# Altium PCB PCB1.PcbDoc
Units mm, origin at the board's own origin, x right, y up, seen from the top; angles counter-clockwise.
Board outline 124.25 x 58 mm, 2 copper layers (Top Layer, Bottom Layer); 80 components, 57 nets, 220 pads, 46 vias.
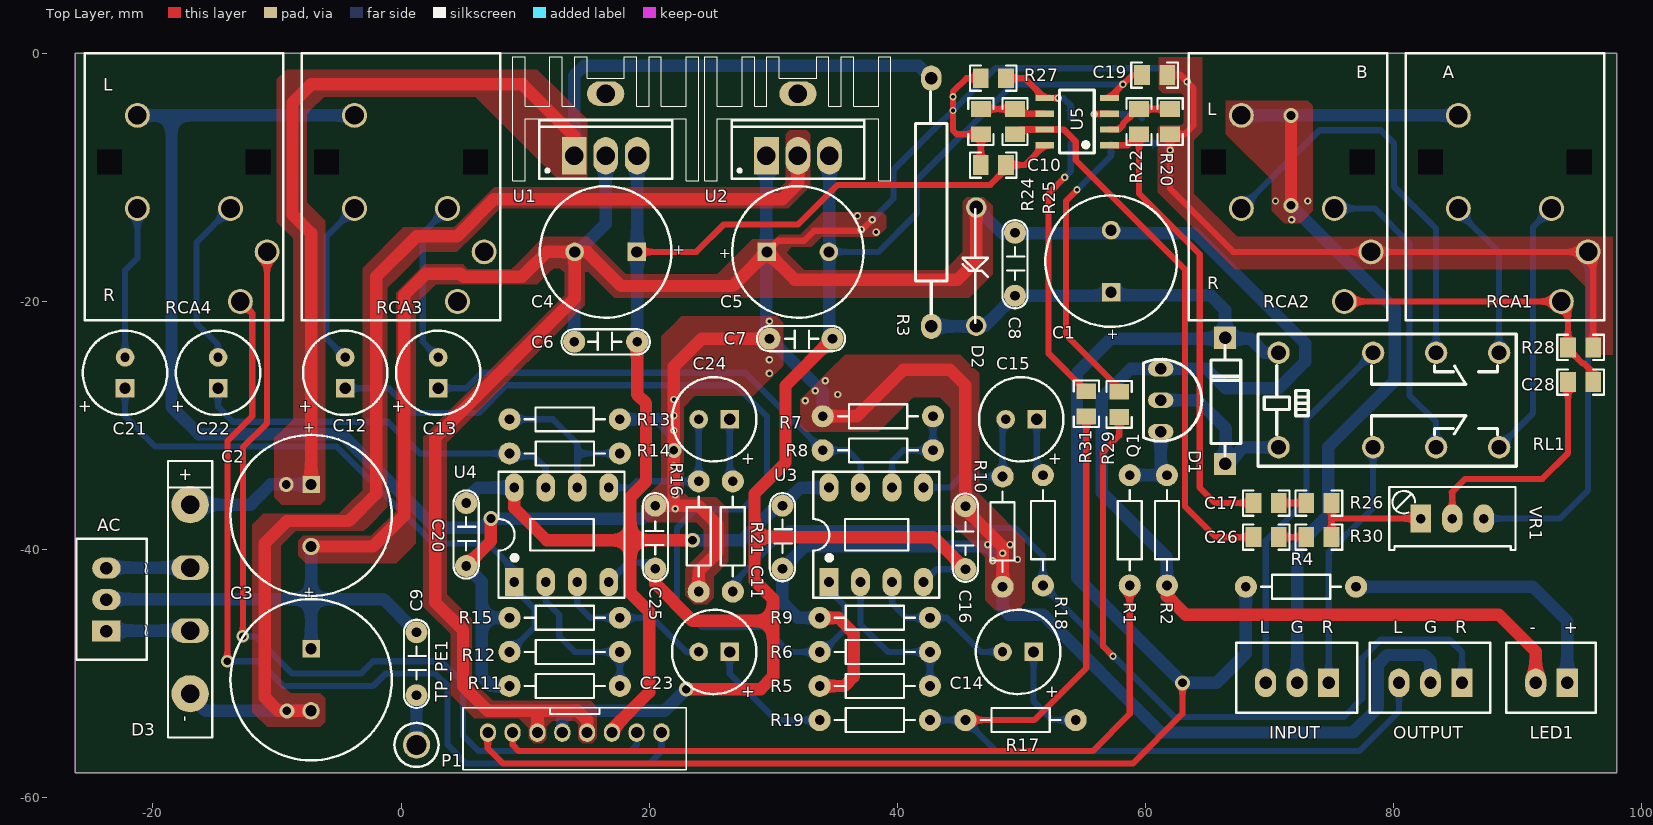
[diagram p0: Top Layer view]
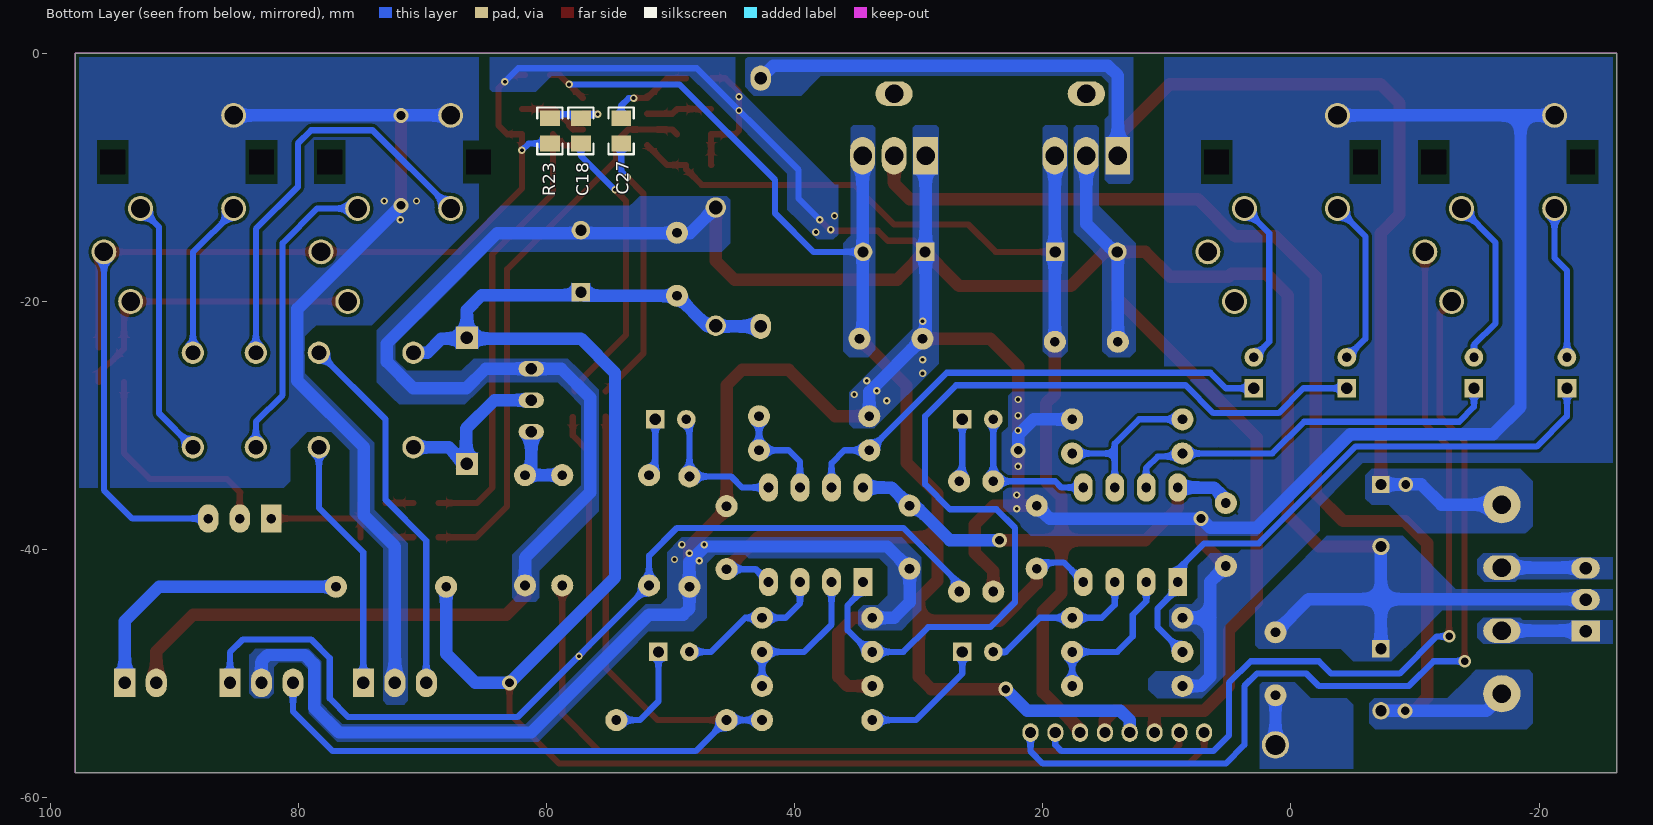
[diagram p1: Bottom Layer view, seen from below]
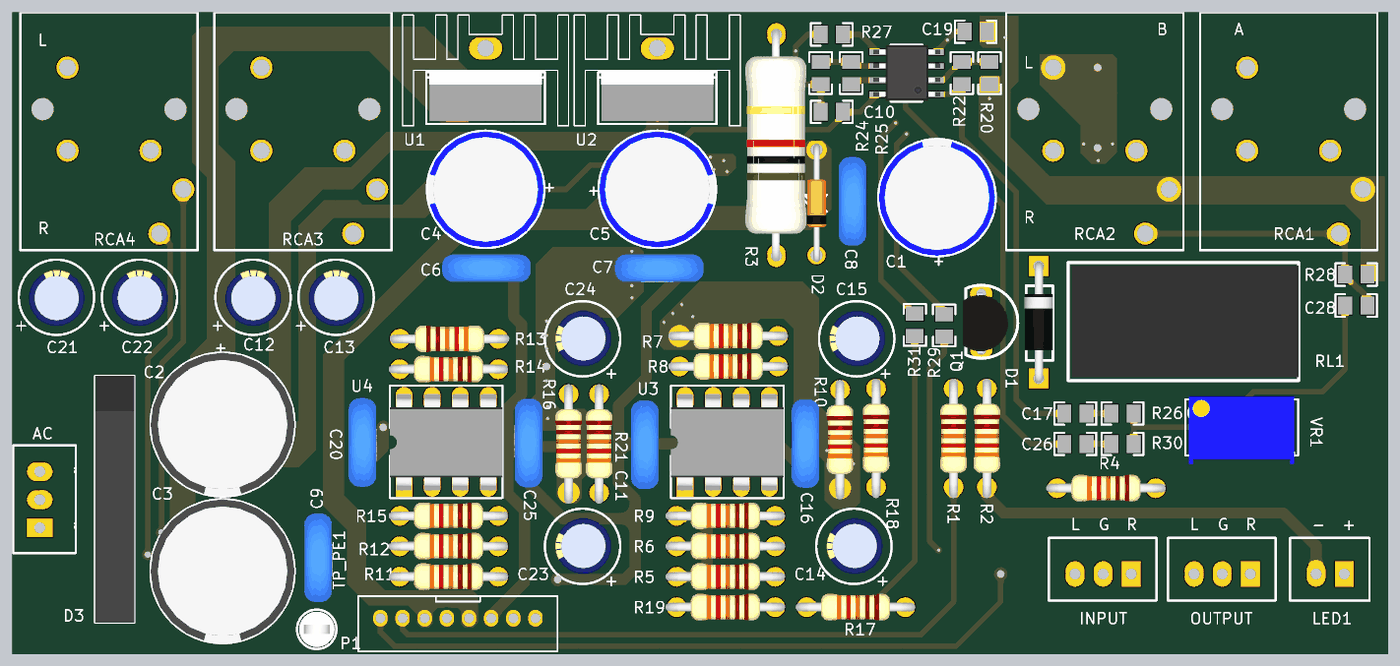
[diagram p2: 3D render of the assembled board from above, using the file's embedded part models]

## Layer stack, top to bottom
Top Solder: solder mask 0.0102, Solder Resist, Dk 3.5
Top Layer: signal copper 0.0356
Dielectric 1: dielectric 0.32, FR-4, Dk 4.8
Bottom Layer: signal copper 0.0356
Bottom Solder: solder mask 0.0102, Solder Resist, Dk 3.5

## Board outline
-26.25,-58 98,-58 98,0 -26.25,0

## Design rules (kind name [scope] priority, off if disabled: settings)
Clearance [All] p1: gap=0.254
MinimumSolderMaskSliver [All] p1: minsoldermaskwidth=0.1
PolygonConnect [All] p1: connectstyle=Direct reliefconductorwidth=0.254 reliefentries=4 polygonreliefangle="90 Angle" airgapwidth=0.254
RoutingVias [All] p1: holewidth=0.711 width=1.27 viastyle="Through Hole" minholewidth=0.3 minwidth=0.3 maxholewidth=5 maxwidth=5
SilkToSolderMaskClearance [IsPad] p1: minsilkscreentomaskgap=0.01 clearancetoexposedcopper=TRUE
SolderMaskExpansion [All] p1: expansion=0.102
Width [All] p1: maxlimit=5 minlimit=0.254 preferedwidth=0.5
28 further rules are at their usual default settings.

## Classes and differential pairs
component class livestream: C10 C17 C18 C19 C26 C27 C28 R20 R22 R23 R24 R25 R26 R27 R28 R29 R30 R31 U5 VR1

## Components (designator, comment, footprint, x,y, rotation, side; value= is the part's Value field where it differs from the comment)
AC "Header 3_MH" "HEADER 3" -23.75,-44.04 r90 top locked
C1 "100uF/16V" NHG_1000x2200 57.25,-16.75 r90 top
C2 "ELZA350ELL152MK25S" FC_1250x2500 -7.25,-37.25 r270 top locked
C3 "ELZA350ELL152MK25S" FC_1250x2500 -7.25,-50.5 r270 top locked
C4 "680_uF" NHG_1000x2200 16.5,-16 r180 top locked
C5 "680_uF" NHG_1000x2200 32,-16 r0 top
C6 "104" TU_GOM(104-->105pF) 16.5,-23.25 r0 top
C7 "104" TU_GOM(104-->105pF) 32.25,-23 r180 top
C8 "104" TU_GOM(104-->105pF) 49.5,-17 r270 top
C9 "104" TU_GOM(104-->105pF) 1.25,-49.21 r270 top
C10 "104" 0805_HV 47.75,-9 r180 top
C11 "104" TU_GOM(104-->105pF) 30.75,-39 r270 top
C12 "10uF" CAP5x12 -4.5,-25.75 r90 top
C13 "10uF" CAP5x12 3,-25.75 r90 top locked
C14 "10uF" CAP5x12 49.75,-48.25 r180 top
C15 "10uF" CAP5x12 50,-29.5 r180 top
C16 "104" TU_GOM(104-->105pF) 45.5,-39.04 r90 top
C17 "10uF" 0805_HV 69.75,-36.25 r0 top
C18 "10uF" 0805_HV 57.25,-6.25 r90 bottom
C19 "104" 0805_HV 60.75,-1.75 r0 top
C20 "104" TU_GOM(104-->105pF) 5.25,-38.79 r270 top
C21 "10uF" CAP5x12 -22.25,-25.75 r90 top
C22 "10uF" CAP5x12 -14.75,-25.75 r90 top
C23 "10uF" CAP5x12 25.25,-48.25 r180 top
C24 "10uF" CAP5x12 25.25,-29.5 r180 top
C25 "104" TU_GOM(104-->105pF) 20.5,-39 r90 top
C26 "10uF" 0805_HV 69.75,-39 r0 top
C27 "10uF" 0805_HV 54,-6.25 r90 bottom
C28 "106" 0805_HV 95.1,-26.5 r0 top
D1 "Diode 1N4001 DO41 1A 50V (DIP)_MH" SS14 66.5,-28.5 r90 top
D2 "12V" "Diode Zener 1N5359B 5W 24V" 46.25,-17.25 r270 top
D3 "GBU4K-E3/45" GBU -17,-44 r270 top
INPUT "Header 3_MH" "HEADER 3" 72.25,-50.75 r180 top locked
LED1 "LED" "HEADER 2" 92.75,-50.75 r180 top
OUTPUT "Header 3_MH" "HEADER 3" 83,-50.75 r180 top
P1 "ToMICBOARD" HEADER2M_8P 14,-54.75 r180 top locked
Q1 "C1815" TO92 61.25,-27.96 r180 top
R1 "4.7K" "TRO_VACH_ 1/4W" 58.75,-42.89 r90 top
R2 "10K" "TRO_VACH_ 1/4W" 61.75,-42.89 r90 top
R3 "TRO_CS_2W_MH" TRO_VACH_2W 42.75,-12 r270 top
R4 "4.7K" "TRO_VACH_ 1/4W" 68.11,-43 r0 top
R5 "1K" "TRO_VACH_ 1/4W" 33.75,-51 r0 top
R6 "8.2K" "TRO_VACH_ 1/4W" 33.75,-48.25 r0 top
R7 "1K" "TRO_VACH_ 1/4W" 34,-29.25 r0 top
R8 "8.2K" "TRO_VACH_ 1/4W" 34,-32 r0 top
R9 "56K" "TRO_VACH_ 1/4W" 33.75,-45.5 r0 top
R10 "56K" "TRO_VACH_ 1/4W" 48.5,-43 r90 top
R11 "1K" "TRO_VACH_ 1/4W" 8.75,-51 r0 top
R12 "8.2K" "TRO_VACH_ 1/4W" 8.75,-48.25 r0 top
R13 "1K" "TRO_VACH_ 1/4W" 17.64,-29.5 r180 top
R14 "8.2K" "TRO_VACH_ 1/4W" 8.75,-32.25 r0 top
R15 "56K" "TRO_VACH_ 1/4W" 8.75,-45.5 r0 top
R16 "56K" "TRO_VACH_ 1/4W" 24,-43.39 r90 top
R17 "22K" "TRO_VACH_ 1/4W" 45.5,-53.75 r0 top
R18 "22K" "TRO_VACH_ 1/4W" 51.75,-42.89 r90 top
R19 "22K" "TRO_VACH_ 1/4W" 33.75,-53.75 r0 top
R20 "1K" 0805_HV 62,-5.5 r90 top
R21 "22K" "TRO_VACH_ 1/4W" 26.75,-43.39 r90 top
R22 "8.2K" 0805_HV 59.5,-5.5 r90 top
R23 "56K" 0805_HV 59.75,-6.25 r90 bottom
R24 "1K" 0805_HV 46.75,-5.5 r90 top
R25 "8.2K" 0805_HV 49.5,-5.5 r90 top
R26 "22K" 0805_HV 74,-36.25 r0 top
R27 "56K" 0805_HV 47.75,-2 r0 top
R28 "4.7K" 0805_HV 95.1,-23.7 r0 top
R29 "22K" 0805_HV 57.9,-28.3 r90 top
R30 "22K" 0805_HV 74,-39 r0 top
R31 "22K" 0805_HV 55.25,-28.25 r90 top
RCA1 "RCA" RCA3P 89,0 r180 top locked
RCA2 "RCA" RCA3P 71.5,0 r180 top
RCA3 "RCA" RCA3P 0,0 r180 top
RCA4 "RCA" RCA3P -17.5,0 r180 top
RL1 "Relay 2A 8pin_MH" "RY-12W-K 12V" 79.64,-27.94 r0 top locked
TP_PE1 "5012" Keystone5012 1.25,-55.75 r90 top
U1 "78M15" TO-220AB 16.5,-8.25 r0 top locked
U2 "79M15" TO-220AB 32,-8.25 r0 top
U3 "TL082ACP" DIP8 38.31,-38.81 r0 top
U4 "TL082ACP" DIP8 12.94,-38.81 r0 top
U5 "TL082ACP" "SOP 8" 54.5,-5.5 r90 top locked
VR1 "50K" VR-3V 84.75,-37.5 r0 top

## Footprints (in the part's own frame and the unit in brackets; to place one, negate y for a bottom-side part, rotate by r counter-clockwise, add the part's x,y. Pads: shape width x height; smd on the part's side, far side on the other; paste and mask are expansions set on the pad)
0805_HV [mil] "0805 with 30mil clearance between pads"
  rect 50x63 smd: 1(-40,0) 2(40,0)
  silkscreen extent -74,-40 74,40, body extent -43,-29 43,29, height 57
CAP5x12 [mm] "Electrolytic Capacitor Radial 5x12 ver.2"
  rect 1.5x1.5 hole 0.9: 1(-1.25,0)
  round 1.5 hole 0.75: 2(1.25,0)
  silkscreen extent -3.4,-3.4 3.4,3.4, body extent -2.62,-2.57 2.46,2.51, height 13.2
"Diode Zener 1N5359B 5W 24V" [mil]
  round 65 hole 43.31: 1(-190,5) 2(185,5)
  silkscreen extent -185,-38 175,42, body extent -210,-29 210,40, height 84
DIP8 [mil]
  rect 60x90 hole 31: 1(-150,-150)
  oval 60x90 hole 31: 2(-50,-150) 3(50,-150) 4(150,-150) 5(150,150) 6(50,150) 7(-50,150) 8(-150,150)
  silkscreen extent -200,-200 200,200, body extent -200,-190 200,186, height 201
FC_1250x2500 [mm] "TH, 2-Leads, Dia 12.5mm, Lead Spacing 5mm"
  rect 1.4x1.4 hole 0.9: 1(-2.5,0)
  round 1.4 hole 0.9: 2(2.5,0)
  silkscreen extent -6.5,-6.5 6.5,6.5, body extent -6.45,-6.49 6.49,6.49, height 27.01
GBU [mm] "Comchip / Diodes Inc diode bridge"
  round 3 hole 1.5: 1(-7.62,0) 4(7.62,0)
  oval 2x3 hole 1.5: 2(-2.54,0) 3(2.54,0)
  silkscreen extent -11.15,-1.78 11.15,1.78, body extent -11.15,-1.76 11.15,1.8, height 21.55
HEADER2M_8P [mm]
  oval 1.3x1.5 hole 0.9 mask+0.001: 1(-7,0) 2(-5,0) 3(-3,0) 4(-1,0) 5(1,0) 6(3,0) 7(5,0) 8(7,0)
  silkscreen extent -9,-2 9,3
"HEADER 2" [mm]
  rect 1.7x2.3 hole 1: 1(-1.27,0)
  oval 1.7x2.3 hole 1: 2(1.27,0)
  silkscreen extent -3.56,-3.25 3.63,2.41
"HEADER 3" [mm]
  rect 1.7x2.3 hole 1 paste+0: 1(-2.54,0)
  oval 1.7x2.3 hole 1 paste+0: 2(0,0) 3(2.54,0)
  silkscreen extent -4.83,-3.25 4.9,2.41
Keystone5012 [mil] "Keystone Multipurpose loops"
  round 87 hole 63: 1(0,0)
  silkscreen extent -70,-70 70,70, body extent -63,-63 63,62, height 319
NHG_1000x2200 [mm] "Panasonic"
  rect 1.5x1.5 hole 0.9: 1(-2.5,0)
  round 1.5 hole 0.9: 2(2.5,0)
  silkscreen extent -5.3,-5.3 5.3,5.3, body extent -5.21,-5.24 5.24,5.24, height 24.01
RCA3P [mm]
  round 2 hole 1.5 paste+0: 1(3.75,5) 2(3.75,12.5) 3(-3.75,12.5) 4(-6.7,16) 5(-4.55,20)
  round 0 hole 2 square paste+0: NC(-6,8.75) NC(6,8.75)
  silkscreen extent -8,0 8,21.5
"RY-12W-K 12V" [mm]
  round 1.8 hole 1.2: 1(-8.89,-3.81) 2(-8.89,3.81) 3(-1.27,-3.81) 4(-1.27,3.81) 5(3.81,-3.81) 6(3.81,3.81) 7(8.89,-3.81) 8(8.89,3.81)
  silkscreen extent -10.56,-5.34 10.27,5.33, body extent -10.25,-5.05 10.25,5.05, height 12
"SOP 8" [mil]
  rect 20x60 smd: 1(-75,-102.5) 2(-25,-102.5) 3(25,-102.5) 4(75,-102.5) 5(75,102.5) 6(25,102.5) 7(-25,102.5) 8(-75,102.5)
  silkscreen extent -100,-55 100,55, body extent -98,-120 100,117, height 63
SS14 [mm]
  rect 1.8x1.8 hole 1: 1(-4.595,0.064) 2(5.565,0.064)
  silkscreen extent -3.96,-1.21 4.93,1.21, body extent -4.98,-1.22 5.95,1.35, height 2.55
TO92 [mm] "TO, Flat Index; 3 In-Line, Axial Leads; Body Dia. 4.8mm"
  oval 2.032x1.27 hole 0.9: 1(0,-2.54) 2(0,0) 3(0,2.54)
  silkscreen extent -3.3,-3.3 1.4,3.3, body extent -2.41,-2.64 1.67,2.89, height 8.53
TO-220AB [mm] "TO, Thru-Hole, Vertical, Heatsink Mounted; 3 In-Line Leads; Pitch 2.54 mm"
  rect 2x3 hole 1.5 paste+0: 1(-2.54,0)
  oval 2x3 hole 1.5 paste+0: 2(0,0) 3(2.54,0)
  oval 3x2 hole 1.5 paste+0: NC(0,5)
  silkscreen extent -7.5,-2 7.5,8, body extent -5.08,-1.57 5.08,3, height 20.54
TRO_VACH_2W [mil]
  oval 80x65 hole 40: 1(-393.7,0) 2(393.7,0)
  silkscreen extent -351,-50 354,50, body extent -414,-110 414,107, height 217
"TRO_VACH_ 1/4W" [mil] "R 1/4W, 2 Pin, 350mil"
  round 70 hole 31: 1(0,0) 2(350,0)
  silkscreen extent 48,-38 302,38, body extent -40,-47 386,47, height 111
TU_GOM(104-->105pF) [mil]
  round 70 hole 31: 1(-100,0) 2(100,0)
  silkscreen extent -140,-40 140,40, body extent -154,-44 160,55, height 407
VR-3V [mil]
  rect 65x90 hole 30: 1(-100,0)
  oval 65x90 hole 30: 2(0,0) 3(100,0)
  silkscreen extent -200,-100 201,100, body extent -188,-130 188,110, height 455

## Part data
AC INPUT OUTPUT: "Header 3P XH2.54 th?ng"
C1: library part TU_HOA_100uF_16V_MH, "TU_HOA_100uF_16V"
C2 C3: library part EEU-FC1H561, "CAP ALUM 1500UF 20% 35V RADIAL"
C4 C5: library part TU_HOA_680_uF_25V_MH, "TU_HOA_680_uF_25V"
C6 C7 C8 C9 C10 C11 C16 C19 C20 C25 C28: library part "TU_MICA_ 104 100V(2A104J)_MH"
C12 C13 C17 C21 C22 C26: library part TU_HOA_4.7uF_100V_MH, "TU_HOA_4.7uF_100V_MH"
C14 C15 C18 C23 C24 C27: library part TU_HOA_10uF_16V_MH
D1: "Diode 1N4001 DO41 1A 50V (DIP)"
D2: library part "Diode 1N4148 DO35 450mA 100V ( 1N4148 DIP)_MH", "Diode 1N4148 DO35 450mA 100V ( 1N4148 DIP)"
D3: "Diode, Switching-Bridge, 800V, 4A, TH"
LED1: library part "Header 2_MH", "Header 2P XH2.54 th?ng"
P1: library part "Header 8", "Header, 8-Pin"
Q1: library part "C1815 TO92 TRANS NPN 0.15A 50V (DIP)_MH"
R1 R2 R4: library part TRO_VACH_1/2W_MH, "Resistor"
R5 R6 R7 R8 R9 R10 R11 R12 R13 R14 R15 R16 R17 R18 R19 R20 R21 R22 R23 R24 R25 R26 R27 R28 R29 R30 R31: library part TRO_VACH_1/4W_MH
RCA1 RCA2 RCA3 RCA4: library part "Header 5_MH", "Header 5P XH2.54 th?ng"
RL1: "rele 2A"
TP_PE1: "Test Point, Multipurpose, White, TH"
U1: library part 78M12, "78M12 TO252_MH"
U2: library part 7915, "78M12 TO252_MH"
U3 U4 U5: "JFET-Input Operational Amplifier"
VR1: library part "BIEN_TRO_VR 204-200K 3296W_MH", "VR-vuong"

## Via types
v1: diameter 0.6, hole 0.3, Top Layer to Bottom Layer, tented both sides, 35 vias
v2: diameter 1.2, hole 0.7, Top Layer to Bottom Layer, tented both sides, 9 vias
v3: diameter 1, hole 0.6, Top Layer to Bottom Layer, tented both sides, 2 vias

## Nets (pads, with @x,y where several pads share a name; then routed paths per layer and width w, separated by ;. In a path a pad name is that pad's centre, name@x,y a point inside that pad or via, vN(x,y) a via of type N, cw(c..) or ccw(c..) an arc to the next point about the centre after c; other vN are vias at no path point)
12V: C1.1 C8.2 D1.2 D2.2 P1.8 R3.2 R4.1 RL1.2 | length 147.3
  Top Layer w0.5: P1.8 7,-56 8.25,-57.25 59,-57.25 63,-53.25 v2(63,-50.75)
  Bottom Layer w1: R3.2 47.04,-22 C8.2 56.96,-19.54 C1.1 57.5,-19.5 65.25,-19.5 66.436,-20.686 D1.2 ; D1.2@66.25,-23 57.25,-23 54.5,-25.75 54.5,-42.25 v2(63,-50.75) 65.75,-50.75 68.11,-48.39 R4.1 ; D1.2@66.436,-23 68.5,-23 69.63,-24.13 RL1.2
+15V: C4.1 C6.2 C10.1 C11.1 C20.1 P1.3 U1.3 U3.8 U4.8 U5.8 | length 120
  Top Layer w0.5: C4.1 23.8,-16 26,-13.8 32,-13.8 35.2,-10.6 47.5,-10.6 48.766,-9.334 C10.1 50.301,-9 U5.8
  Top Layer w1: U4.8 9.13,-36.63 11.75,-39.25 18.5,-39.25 ; P1.3 17,-54.5 20,-51.5 20,-45 18.5,-43.5 18.5,-39.25 ; C6.2 19.04,-27.49 19.75,-28.2 19.75,-34.5 18.5,-35.75 18.5,-39.25 ; v2(23.5,-39.25) 18.5,-39.25
  Bottom Layer w1: C20.1@5.25,-35.96 6.21,-35 U4.8 ; C6.2 U1.3 ; v2(23.5,-39.25) 27.5,-39.25 30.29,-36.46 C11.1 32.21,-35 U3.8
-15V: C5.2 C7.1 C16.1 C19.1 C25.1 P1.5 U2.3 U3.4 U4.4 U5.4 | length 137.5
  Top Layer w0.5: U5.4 58.949,-1.75 C19.1
  Top Layer w1: C25.1 20.5,-42.75 23.5,-45.75 30,-45.75 ; v2(23,-51.25) 29,-51.25 30,-50.25 30,-45.75 ; C7.1 31,-26.79 31,-33 28.5,-35.5 28.5,-39 ; C16.1 42.92,-39 28.5,-39 ; 28.5,-39 28.5,-42.5 30,-44 30,-45.75
  Bottom Layer w0.5: U4.4 18.33,-41.04 C25.1@20.75,-41.04 ; C5.2 34.54,-16 38.5,-16 41.6,-12.9 41.6,-10.2 49.3,-2.5 v1(58.2,-2.5) ; U3.4 43.16,-41.58 C16.1
  Bottom Layer w1: P1.5 13,-53.75 13.75,-53 21.25,-53 v2(23,-51.25) ; U2.3 34.54,-16 34.54,-22.75 C7.1
DIR_C: P1.7 R1.1 | length 62.6
  Top Layer w0.5: P1.7 9,-55.75 9.5,-56.25 55.75,-56.25 58.75,-53.25 R1.1
GND: AC.2 C1.2 C2.2 C3.1 C4.2 C5.1 C6.1 C7.2 C8.1 C9.1 C10.2 C11.2 C16.2 C19.2 C20.2 C25.2 D2.1 LED1.2 OUTPUT.2 P1.4 P1.6 Q1.1 R2.1 R5.1 R7.1 R9.1 R10.1 R11.1 R13.1 R15.1 R16.1 R20.1 R23.1 R24.1 R27.1 R28.2 RCA1.4 RCA2.4 RCA3.1 RCA4.1 U1.2 U2.1 VR1.3 | length 709.6
  Top Layer w0.5: C5.1 30.4,-15.1 32.5,-15.1 33.3,-14.3 37.1,-14.3 v1(38,-13.4) ; C10.2 46.75,-8.984 R24.1 44.816,-6.516 44.5,-6.2 44.5,-3.1 45.6,-2 R27.1 ; C19.2 62.85,-1.75 v1(63.375,-2.275) 63.9,-2.8 63.9,-5.8 63.184,-6.516 R20.1 v1(62,-7.8) 62,-10.9 67.1,-16 RCA2.4 RCA1.4 96.116,-16.416 R28.2
  Top Layer w1: C2.2 -2.25,-39.75 0.25,-37.25 0.25,-19.5 2,-17.75 4.781,-17.75 5.031,-18 9.75,-18 11.75,-16 C4.2 ; C20.2 7.25,-39.33 v2(7.25,-37.5) ; P1.6 11,-53.25 10.75,-53 ; P1.4 15,-53.75 14.25,-53 10.75,-53 ; C25.2 21.79,-36.46 ; R16.1 24,-41.75 25.5,-40.25 25.5,-38 23.96,-36.46 21.79,-36.46 ; C7.2 24.25,-23 22,-25.25 v2(22,-32) 22,-36.25 21.79,-36.46 ; R5.1 35.75,-51 36.5,-50.25 36.5,-46.75 35.25,-45.5 R9.1 ; R7.1 36.75,-29.25 40.5,-25.5 44.25,-25.5 45.5,-26.75 C16.2 45.5,-36.75 48.5,-39.75 R10.1 ; D2.1 46.377,-16.723 44.85,-18.25 31.75,-18.25 C5.1 26.75,-18.75 17.75,-18.75 15,-16 C4.2 ; R2.1 61.75,-43.75 63.25,-45.25 88.5,-45.25 91.48,-48.23 LED1.2 ; 10.75,-53 7,-53 5,-51 5,-46.5 2.75,-44.25 2.75,-31 14,-19.75 C4.2
  Bottom Layer w0.5: v1(38,-13.4) 39.7,-11.7 39.7,-9.4 47.9,-1.2 62.3,-1.2 v1(63.375,-2.275) ; R23.1 61.466,-7.266 v1(62,-7.8) ; VR1.3 93.4,-37.5 95.7,-35.2 RCA1.4
  Bottom Layer w1: AC.2@-23.75,-44 -7.25,-44 ; RCA4.1 -18.5,-5 ; C3.1 -7.25,-44 ; C2.2 -7.25,-44 ; RCA3.1 -18.5,-5 ; C9.1 -1.42,-44 -7.25,-44 ; C20.2 6.5,-42.58 6.5,-45.5 ; R11.1 7.25,-51 6.5,-50.25 6.5,-45.5 ; R15.1 6.5,-45.5 ; C6.1 13.96,-16.29 16.5,-13.75 U1.2 ; R13.1 20.75,-29.5 22,-30.75 v2(22,-32) ; C25.2 19.46,-37.5 v2(7.25,-37.5) 6.5,-38.25 2.77,-38.25 -4.784,-30.696 -16.304,-30.696 -18.5,-28.5 -18.5,-5 ; U2.1 29.46,-22.75 C7.2 34,-27.29 R7.1 ; R9.1 32,-45.5 30.75,-44.25 C11.2 30.76,-41.54 32.55,-39.75 47.25,-39.75 48.5,-41 R10.1 48.5,-44.75 49,-45.25 51.75,-45.25 61.25,-54.75 76.75,-54.75 78.75,-52.75 78.75,-49.25 79.5,-48.5 82.5,-48.5 83,-49 OUTPUT.2 ; D2.1 48.453,-14.5 64,-14.5 72.9,-23.4 72.9,-24.85 70.75,-27 66.5,-27 64.92,-25.42 Q1.1 58.83,-25.42 56.5,-27.75 56.5,-35.4 61.75,-40.65 R2.1
  other v1: 47.7,-40.9 49.7,-40.8 48.5,-40.3 47.3,-39.6 49.1,-39.6 22.1,-36.7 22.1,-35.6 22,-33.3 22,-30.4 22,-29.2 32.6,-28 22,-27.9 35.2,-27.5 33.4,-27.2 34.2,-26.4 29.7,-25.8 29.7,-24.7 29.7,-21.6 38.3,-14.4 37.1,-14.2 36.8,-13.1 44.5,-4.6 44.5,-3.5
GND_IN: INPUT.2 RCA1.1 RCA2.1 | length 70
  Top Layer w1: v2(71.75,-12.25) v2(71.75,-5)
  Bottom Layer w1: RCA2.1 v2(71.75,-5) RCA1.1 ; v2(71.75,-12.25) 80.1,-20.6 80.1,-26.4 74.75,-31.75 74.75,-37.25 72.25,-39.75 INPUT.2
  other v1: 71.8,-13.4 70.5,-11.9 73.1,-11.9
GND_MO: P1.2 RCA4.4 | length 71.9
  Top Layer w0.5: v3(-12.75,-47) -12.75,-31.75 -10.8,-29.8 RCA4.4
  Bottom Layer w0.5: v3(-12.75,-47) -11.75,-47 -8.75,-50 -3.25,-50 -2.25,-49 3.25,-49 5,-50.75 5,-55 6.25,-56.25 18.5,-56.25 19,-55.75 P1.2
IN_L: INPUT.3 RL1.4 | length 30.2
  Bottom Layer w0.5: INPUT.3 69.71,-39.29 73,-36 73,-29.5 RL1.4
IN_R: INPUT.1 RL1.3 | length 20.5
  Bottom Layer w0.5: INPUT.1 74.79,-40.21 78.37,-36.63 RL1.3
INA_L: RCA1.2 RL1.8 | length 13
  Bottom Layer w0.5: RCA1.2 85.25,-12.75 88.53,-16.03 RL1.8
INA_R: RCA1.3 RL1.7 | length 21
  Bottom Layer w0.5: RL1.7 91.25,-29.03 91.25,-14 RCA1.3
INB_L: RCA2.2 RL1.6 | length 33.6
  Bottom Layer w0.5: RCA2.2 74.05,-6.2 79,-6.2 80.054,-7.254 80.054,-10.754 83.45,-14.15 RL1.6
INB_R: RCA2.3 RL1.5 | length 24.6
  Bottom Layer w0.5: RCA2.3 78.5,-12.5 81.3,-15.3 81.3,-27.55 83.45,-29.7 RL1.5
LV_OUT: C28.2 R28.1 RCA1.5 RCA2.5 | length 25.1
  Top Layer w0.5: RCA2.5 RCA1.5 94.084,-20.534 R28.1 94.084,-23.816 95.272,-25.004 95.388,-25.004 96.116,-25.732 C28.2
MO: P1.1 RCA4.5 | length 74.2
  Top Layer w0.5: v3(-14,-49) -14,-31.25 -12,-29.25 -12,-20.95 RCA4.5
  Bottom Layer w0.5: v3(-14,-49) -11.5,-49 -9.5,-51 -2.25,-51 -1.25,-50 2.75,-50 3.75,-51 3.75,-55.75 5.25,-57.25 20,-57.25 21,-56.25 P1.1
NetAC_1: AC.1 D3.3 | length 6.8
  Bottom Layer w1: AC.1@-23.75,-46.54 D3.3
NetAC_3: AC.3 D3.2 | length 6.8
  Bottom Layer w1: AC.3@-23.75,-41.46 D3.2
NetC3_2: C3.2 D3.4 U2.2 | length 94.5
  Top Layer w1: C3.2 -9.9,-53 -11,-51.9 -11,-39.5 -9.2,-37.7 -4.2,-37.7 -2,-35.5 -2,-18 1.25,-14.75 4.5,-14.75 7.5,-11.75 30.75,-11.75 32,-10.5 U2.2
  Bottom Layer w1: D3.4 -17,-51.75 -15.75,-53 C3.2
  other v2: -9.2,-53
NetC9_2: C9.2 TP_PE1.1 | length 4
  Bottom Layer w1: TP_PE1.1 C9.2
NetC12_1: C12.1 R6.1 U3.1 | length 78.2
  Bottom Layer w0.5: C12.1@-4.5,-27.25 -4.25,-27 -1,-27 1,-29 6.25,-29 8.5,-26.75 27,-26.75 29.5,-29.25 29.5,-34.75 27.5,-36.75 23.75,-36.75 22.25,-38.25 22.25,-44.25 24.25,-46.25 29.25,-46.25 31.25,-48.25 R6.1 34,-48.25 35.75,-46.5 35.75,-44.5 34.5,-43.25 U3.1 U3.1@34.5,-41.75
NetC13_1: C13.1 R8.1 U3.7 | length 39.6
  Bottom Layer w0.5: C13.1@3,-27.25 3.25,-27 5.25,-27 6.5,-25.75 27.75,-25.75 R8.1 36,-32 37.04,-33.04 U3.7
NetC14_1: C14.1 R17.2 | length 8
  Bottom Layer w0.5: C14.1 51,-52.25 52.5,-53.75 R17.2
NetC14_2: C14.2 R9.2 U3.3 | length 12.3
  Bottom Layer w0.5: U3.3 39.58,-44.33 40.75,-45.5 R9.2 44,-45.5 46.75,-48.25 C14.2
NetC15_1: C15.1 R18.2 | length 4.7
  Bottom Layer w0.5: C15.1 51.25,-33.5 R18.2
NetC15_2: C15.2 R10.2 U3.5 | length 11.5
  Bottom Layer w0.5: U3.5 44.25,-35 45.14,-34.11 R10.2 48.5,-29.75 C15.2
NetC17_1: C17.1 R22.1 U5.1 | length 38.1
  Top Layer w0.5: U5.1 58.611,-7.405 R22.1 59.5,-11.3 64.4,-16.2 64.4,-35 65.65,-36.25 C17.1
NetC17_2: C17.2 R26.1 | length 2.2
  Top Layer w0.5: C17.2 R26.1
NetC18_1: C18.1 R29.2 | length 23.2
  Top Layer w0.5: v1(54.5,-11) 53.6,-11.9 53.6,-22.7 57.75,-26.85 R29.2@57.75,-27.234
  Bottom Layer w0.5: v1(54.5,-11) 57.25,-8.25 C18.1
NetC18_2: C18.2 R23.2 U5.3 | length 5.2
  Top Layer w0.5: v1(55.9,-4.9) 55.935,-4.865 U5.3
  Bottom Layer w0.5: v1(55.9,-4.9) 59.416,-4.9 R23.2
NetC21_1: C21.1 R12.1 U4.1 | length 46.9
  Bottom Layer w0.5: C21.1 -22.25,-29.25 -19.8,-31.7 -5.2,-31.7 2.6,-39.5 7,-39.5 9.13,-41.63 U4.1 9.13,-43.13 10.75,-44.75 10.75,-46.25 R12.1
NetC22_1: C22.1 R14.1 U4.7 | length 31.6
  Bottom Layer w0.5: C22.1@-15,-27 -14.75,-27.25 -14.75,-28.5 -13.558,-29.692 -1.058,-29.692 1.5,-32.25 R14.1 9,-32.5 10.75,-32.5 11.67,-33.42 U4.7
NetC23_1: C23.1 R19.1 | length 10.6
  Bottom Layer w0.5: C23.1 26.5,-50 30.25,-53.75 R19.1
NetC23_2: C23.2 R15.2 U4.3 | length 13.2
  Bottom Layer w0.5: U4.3 14.21,-44.46 15.25,-45.5 R15.2 20.25,-45.5 23,-48.25 C23.2
NetC24_1: C24.1 R21.2 | length 5.1
  Bottom Layer w0.5: C24.1 26.5,-34.25 R21.2
NetC24_2: C24.2 R16.2 U4.5 | length 12.5
  Bottom Layer w0.5: U4.5 18.5,-35 19,-34.5 R16.2 C24.2
NetC26_1: C26.1 R25.1 U5.7 | length 45.1
  Top Layer w0.5: R25.1 49.881,-6.135 U5.7 53.435,-6.135 54.4,-7.1 54.4,-8.6 63.2,-17.4 63.2,-36.5 65.7,-39 C26.1
NetC26_2: C26.2 R30.1 | length 2.2
  Top Layer w0.5: C26.2 R30.1
NetC27_1: C27.1 R31.2 | length 22
  Top Layer w0.5: v1(53.5,-10) 52.2,-11.3 52.2,-24.184 R31.2
  Bottom Layer w0.5: v1(53.5,-10) 54,-9.5 C27.1
NetC27_2: C27.2 R27.2 U5.5 | length 7.2
  Top Layer w0.5: R27.2 50.302,-2 U5.5 52.995,-3.595 v1(53,-3.6)
  Bottom Layer w0.5: v1(53,-3.6) 53.4,-3.6 54,-4.2 C27.2
NetC28_1: C28.1 VR1.2 | length 18.5
  Top Layer w0.5: VR1.2 84.75,-35.45 84.7,-35.4 85.8,-34.3 92,-34.3 94.084,-32.216 C28.1
NetLED1_1: LED1.1 R4.2 | length 23.1
  Bottom Layer w1: R4.2 91.25,-43 94.02,-45.77 LED1.1
NetQ1_3: Q1.3 R1.2 R2.2 | length 6.7
  Bottom Layer w1: R1.2 R2.2 61.25,-33.5 Q1.3
NetR5_2: R5.2 R6.2 U3.2 | length 12.7
  Bottom Layer w0.5: U3.2 37.04,-46.04 39.25,-48.25 R6.2 R5.2
NetR7_2: R7.2 R8.2 U3.6 | length 8.5
  Bottom Layer w0.5: U3.6 39.58,-32.92 40.5,-32 R8.2 R7.2
NetR11_2: R11.2 R12.2 U4.2 | length 13
  Bottom Layer w0.5: U4.2 11.67,-44.17 12.75,-45.25 12.75,-47 14,-48.25 R12.2 R11.2
NetR13_2: R13.2 R14.2 U4.6 | length 13.2
  Bottom Layer w0.5: R13.2 12.25,-29.5 14.21,-31.46 14.21,-32.25 ; U4.6 14.21,-32.25 ; R14.2 14.21,-32.25
NetR20_2: R20.2 R22.2 U5.2 | length 5.6
  Top Layer w0.5: U5.2 57.849,-6.135 58.196,-5.788 58.196,-5.672 59.384,-4.484 R22.2 R20.2
NetR24_2: R24.2 R25.2 U5.6 | length 5.3
  Top Layer w0.5: R24.2 R25.2 49.881,-4.865 U5.6
NetR26_2: R26.2 R30.2 VR1.1 | length 10
  Top Layer w0.5: R30.2 75.016,-37.6 ; R26.2 75.016,-37.6 ; VR1.1 75.116,-37.5 75.016,-37.6
OUT_L: OUTPUT.3 R17.1 R19.2 R31.1 | length 74.4
  Top Layer w0.5: R17.1 51.05,-53.75 55.25,-49.55 R31.1
  Bottom Layer w0.5: R19.2@42.64,-53.89 R19.2 R17.1 48,-56.25 77.25,-56.25 80.46,-53.04 OUTPUT.3
OUT_R: OUTPUT.1 R18.1 R21.1 R29.1 | length 96.5
  Top Layer w0.5: v1(57.4,-48.6) 56.6,-47.8 56.6,-32.1 57.9,-30.8 R29.1
  Bottom Layer w0.5: R21.1 26.75,-42.75 31.25,-38.25 49.5,-38.25 51.75,-40.5 R18.1 62.36,-53.5 76,-53.5 77.5,-52 77.5,-48.75 79,-47.25 84.5,-47.25 85.54,-48.29 OUTPUT.1
OUTA_L: C12.2 RCA3.2 | length 13.6
  Bottom Layer w0.5: C12.2 -6,-23 -6,-14.75 RCA3.2
OUTA_R: C13.2 RCA3.3 | length 13.3
  Bottom Layer w0.5: C13.2 1.75,-23.25 1.75,-14.5 RCA3.3
OUTB_L: C21.2 RCA4.2 | length 12.4
  Bottom Layer w0.5: C21.2 -22.25,-17.5 -21.25,-16.5 RCA4.2
OUTB_R: C22.2 RCA4.3 | length 13.9
  Bottom Layer w0.5: C22.2 -14.75,-23.5 -16.5,-21.75 -16.5,-15.25 RCA4.3
V+: D1.1 Q1.2 RL1.1 | length 13.9
  Bottom Layer w1: Q1.2 64.21,-27.96 66.5,-30.25 66.5,-33.16 67.91,-31.75 RL1.1
VCC: C2.1 D3.1 R3.1 U1.1 | length 104.4
  Top Layer w1: C2.1 -7.25,-14.5 -8.75,-13 -8.75,-4 -7.25,-2.5 9.8,-2.5 13.96,-6.66 U1.1
  Bottom Layer w1: D3.1 -12.13,-36.38 -10.5,-34.75 v2(-9.25,-34.75) C2.1 ; U1.1 13.96,-1.79 14.75,-1 41.75,-1 R3.1
pads on no net: RCA1.NC RCA2.NC RCA3.4 RCA3.5 RCA3.NC RCA4.NC U1.NC U2.NC

## Polygon pours and split planes (outlines as drawn)
GND on Bottom Layer "Bottom Layer-No Net 1" (solid, pour order 61): 19.5,-27.2 22.4,-27.2 22.6,-27.4 22.8,-27.6 22.8,-28.5 22.8,-30.1 23.3,-30.6 23.3,-32.5 23.3,-33.567 23.066,-33.801 23.064,-33.8 21.4,-33.8
GND on Bottom Layer "Bottom Layer-No Net 1" (solid, pour order 58): 18.3,-36.8 19.3,-35.8 20.068,-35.032 22.771,-35.032 22.932,-35.032 23.1,-35.2 23.2,-35.3 23.2,-35.8 23.2,-36.7 22.4,-37.5 21,-38.9 19.9,-38.9 17.1,-38.9 16.9,-38.7
GND on Bottom Layer "Bottom Layer-No Net 1" (solid, pour order 56): -26,-29.8 -26,-30.1 -26,-31.8 -26,-33 -5.8,-33 -4.7,-34.1 -2.3,-36.5 -2.3,-37.5 -2.3,-38.5 -1.5,-39.3 5.3,-46.1 5.3,-48.3 5.3,-50.1 6.5,-51.3 7.2,-52 10.8,-52 11.5,-51.3 11.5,-50.8 11.5,-50.4 11,-49.9 10.9,-49.8 9,-49.8 7.9,-49.8 7.6,-49.5 7.3,-49.2 7.3,-48.2 7.3,-47.3 7.8,-46.8 8,-46.6 9.1,-46.6 9.4,-46.6 9.7,-46.3 9.8,-46.2 9.8,-45.3 9.8,-44.9 9.5,-44.6 9.3,-44.4 8,-44.4 7.5,-43.9 7.5,-41.6 7.5,-41.3 6.8,-40.6 6.5,-40.3 5.1,-40.3 4.3,-40.3 0.7,-36.7 -6.553,-29.447 -22.725,-29.447
GND on Bottom Layer "Bottom Layer-No Net 1" (solid, pour order 51): -2.6,-0.3 -26.25,-0.3 -26.25,-31.3 -25.55,-32 -16.9,-32 -8.2,-32 -5.6,-32 1.3,-38.9 20.4,-38.9 19.4,-37.9 19.4,-36.838 6.762,-36.838 6.1,-37.5 4.6,-37.5 4.2,-37.1 4,-36.9 4,-34.3 4,-33.5 5.2,-32.3 10.2,-27.3 10.2,0
GND on Bottom Layer "Bottom Layer-No Net 1" (solid, pour order 54): 10.2,-24.9 10.2,-26.9 10.2,-27.1 9.6,-27.7 9.048,-28.252 9.048,-28.386 3.8,-33.635 3.8,-37.5 4.367,-36.933 4.367,-38.067 19.4,-37.9 21,-37.9 21.2,-38.1 22.1,-37.1 23,-36.1 23.083,-33.174 21.75,-30.4 21.75,-29.5 21.75,-25.9 11.2,-25.8 9.8,-24.4
NetC9_2 on Bottom Layer "Bottom Layer-No Net 1" (solid, pour order 49): 2.5,-50.9 2.3,-50.7 0,-50.7 -0.3,-50.7 -0.7,-51.1 -1.6,-52 -3.8,-52 -4.5,-52 -5,-52.5 -5,-58 2.5,-58
+15V on Bottom Layer "Bottom Layer-No Net 1" (solid, pour order 48): 18,-6 18,-10.7 18,-24 18.4,-24.4 18.5,-24.5 19.1,-24.5 19.5,-24.5 20,-24 20,-22.2 20,-14.1 20,-6 19.8,-5.8 18.2,-5.8
-15V on Bottom Layer "Bottom Layer-No Net 1" (solid, pour order 46): 33.5,-6 33.5,-15.7 33.5,-23.9 34.1,-24.5 35.6,-24.5 36.1,-24 36.1,-22 36.1,-15.3 35.6,-14.8 35.5,-14.7 35.5,-11.4 35.5,-6 35.3,-5.8 33.7,-5.8
GND on Bottom Layer "Bottom Layer-No Net 1" (solid, pour order 43): 45.5,-11.5 52.5,-11.5 53,-12 53.3,-12.3 56.3,-12.3 63.7,-12.3 65.9,-14.5 73.7,-22.3 73.7,-24.6 73.7,-26.5 72.4,-27.8 71.9,-28.3 69,-28.3 66.6,-28.3 65.5,-27.2 64.8,-26.5 62,-26.5 59.1,-26.5 58.4,-27.2 57.2,-28.4 57.2,-31.5 57.2,-34.8 58.8,-36.4 62.8,-40.4 62.8,-43.6 62.8,-43.9 62.5,-44.2 60.9,-44.2 60.6,-43.9 60.6,-41.7 59.5,-40.6 55.8,-36.9 55.8,-32.8 55.8,-27.1 57.4,-25.5 58.3,-24.6 61.4,-24.6 65.9,-24.6 66.8,-25.5 66.9,-25.6 69.1,-25.6 71.3,-25.6 72.2,-24.7 72.2,-23.7 72.2,-23.4 68.2,-19.4 64.8,-16 60.7,-16 45.9,-16 45.2,-15.3 45.2,-15.2 45.2,-11.8 45.5,-11.5
GND_IN on Bottom Layer "Bottom Layer-No Net 1" (solid, pour order 41): 65.5,0 65.5,-13.3 70.4,-18.2 74.1,-21.9 77.5,-21.9 78.6,-21.9 79.1,-22.4 79.534,-22.834 79.534,-24.13 79.534,-25.766 77.1,-28.2 77,-28.3 77,-30.5 79.3,-30.5 80.7,-31.9 80.7,-34.5 81.2,-35 87.7,-35 93.6,-35 98,-35 98,0
NetAC_1 on Bottom Layer "Bottom Layer-No Net 1" (solid, pour order 32): -26.25,-45.7 -18.7,-45.7 -18.5,-45.5 -15.5,-45.5 -15,-46 -15,-47.1 -15.5,-47.6 -26.25,-47.6
NetAC_3 on Bottom Layer "Bottom Layer-No Net 1" (solid, pour order 33): -26.3,-40.6 -21,-40.6 -18.4,-40.6 -18.2,-40.4 -18.1,-40.3 -17.1,-40.3 -15.5,-40.3 -15,-40.8 -15,-42 -15.6,-42.6 -18.1,-42.6 -18.3,-42.4 -22.3,-42.4 -26.25,-42.4
GND on Bottom Layer "Bottom Layer-No Net 1" (solid, pour order 34): -26.25,-43.2 -20.9,-43.2 -13.3,-43.2 -9.4,-39.3 -9,-38.9 -6.1,-38.9 -2.9,-38.9 0.5,-42.3 2.9,-44.7 2.9,-47.2 2.9,-47.7 2.6,-48 1.1,-48 -4,-48 -5,-49 -7.3,-49 -8.1,-49 -10.2,-46.9 -12.2,-44.9 -26.25,-44.9
VCC on Bottom Layer "Bottom Layer-No Net 1" (solid, pour order 35): -6.5,-33.5 -9.4,-33.5 -18.5,-33.5 -19.5,-34.5 -19.5,-38.1 -19,-38.6 -18.9,-38.7 -16.8,-38.7 -10.2,-38.7 -8.5,-37 -7.9,-36.4 -6.5,-36.4 -6,-35.9 -6,-35.4 -6,-34 -6.5,-33.5
GND on Bottom Layer "Bottom Layer-No Net 1" (solid, pour order 40): 15.5,-6 15.5,-12.3 14.5,-13.3 12.5,-15.3 12.5,-19.5 12.5,-24 13,-24.5 13.1,-24.5 14.7,-24.5 15.2,-24 15.2,-16.7 16.7,-15.2 17.5,-14.4 17.5,-8.4 17.5,-6 17.3,-5.8 15.7,-5.8
GND on Bottom Layer "Bottom Layer-No Net 1" (solid, pour order 42): 28.4,-6 28.4,-14.7 28.4,-25 33.5,-30.1 33.6,-30.2 34.9,-30.2 35.3,-30.2 35.6,-29.9 35.6,-27.6 35.6,-27.3 34.1,-25.8 30.5,-22.2 30.5,-15.7 30.5,-6 30.3,-5.8 28.6,-5.8
VCC on Bottom Layer "Bottom Layer-No Net 1" (solid, pour order 44): 12.7,-10.2 12.7,-10.1 12.7,0 43.4,0 43.5,0 43.9,-0.4 44,-0.5 44,-1.6 44,-2.7 43.5,-3.2 43.3,-3.4 40.3,-3.4 39.5,-3.4 38.3,-2.2 37.9,-1.8 36.6,-1.8 15.3,-1.8 14.8,-2.3 14.7,-2.4 14.7,-3.2 14.7,-5 15,-5.3 15,-10.2 14.7,-10.5 13,-10.5 12.7,-10.2
GND on Bottom Layer "Bottom Layer-No Net 1" (solid, pour order 50): 34.5,-44.5 34.4,-44.5 33.3,-44.5 32.9,-44.1 32.5,-43.7 32.5,-42.2 32.5,-41.4 33,-40.9 33.2,-40.7 34.8,-40.7 43.7,-40.7 44,-40.4 45,-40.4 46.4,-40.4 46.7,-40.7 47.1,-41.1 47.1,-43 47.1,-45.5 47.7,-46.1 48.2,-46.6 50.1,-46.6 51.8,-46.6 53.5,-48.3 60.7,-55.5 61.8,-55.5 76.9,-55.5 78.8,-53.6 79.2,-53.2 79.2,-51.3 79.2,-49.7 79.4,-49.5 79.8,-49.1 80.9,-49.1 81.6,-49.1 81.8,-49.3 82,-49.5 82,-50.7 82,-51.6 82.4,-52 83.6,-52 84,-51.6 84,-49.4 84,-48.5 83.8,-48.3 83.5,-48 82.6,-48 79.2,-48 78.3,-48.9 78.2,-49 78.2,-50.8 78.2,-52.4 77.3,-53.3 76.5,-54.1 74.5,-54.1 61.7,-54.1 56.3,-48.7 52,-44.4 51.5,-44.4 50.8,-44.4 50.3,-43.9 50.3,-42.2 50.3,-40.2 49.3,-39.2 49.1,-39 46.4,-39 31.4,-39 30.6,-39.8 29.8,-40.6 29.8,-42.5 29.8,-44.9 30.6,-45.7 31.4,-46.5 34.5,-46.5 34.9,-46.1 34.9,-44.9
NetC3_2 on Bottom Layer "Bottom Layer-No Net 1" (solid, pour order 52): -19.5,-50.5 -19.5,-54 -19,-54.5 -6.8,-54.5 -6.4,-54.1 -6.3,-54 -6.3,-52.5 -6.3,-52.4 -6.7,-52 -9.2,-52 -12.6,-52 -14.2,-50.4 -14.9,-49.7 -17.9,-49.7 -19.2,-49.7 -19.5,-50
GND on Bottom Layer "Bottom Layer-No Net 1" (solid, pour order 55): 36.5,-14.6 36.5,-10.6 36.8,-10.6 44,-3.4 44.8,-2.6 44.8,0 64.6,0 64.6,-0.1 64.6,-2.9 64.4,-3.1 63.3,-3.1 60.9,-3.1 59.8,-2 59.6,-1.8 54.7,-1.8 48.5,-1.8 47,-3.3 40.6,-9.7 40.6,-11.4 40.6,-12.6 39.7,-13.5 38.2,-15 36.9,-15
GND_IN on Bottom Layer "Bottom Layer-No Net 1" (solid, pour order 62): 73.3,-11.6 73.2,-11.5 70.5,-11.5 70.4,-11.5 70.1,-11.8 70,-11.9 70,-13 70,-13.1 71.4,-14.5 74.9,-18 76.1,-18 76.3,-18 77,-18.7 79.5,-21.2 79.5,-25.3 79.5,-25.8 75.6,-29.7 73.9,-31.4 73.9,-36.4 73.9,-36.8 71.2,-39.5 71.2,-50.6 71.2,-52.2 71.4,-52.4 71.5,-52.5 72.9,-52.5 73.2,-52.2 73.2,-50.6 73.2,-39.9 75.5,-37.6 75.9,-37.2 75.9,-32.3 75.9,-32 77.5,-30.4 80.6,-27 80.6,-26.2 80.6,-20.3 75.2,-14.9 73.5,-13.2 73.5,-11.7 73.3,-11.5 73.2,-11.5
GND on Top Layer "Bottom Layer-No Net 1" (solid, pour order 59): 23,-21.2 22.6,-21.2 21.9,-21.9 21.2,-22.6 21,-22.8 21,-24.5 21,-35.7 21.1,-35.8 22.6,-35.8 22.7,-35.7 22.7,-28.6 23.7,-27.6 28.4,-27.6 30.8,-25.2 30.8,-22.1 30.8,-21.7 30.3,-21.2
VCC on Top Layer "Bottom Layer-No Net 1" (solid, pour order 36): -6.1,-36 -6.5,-36.4 -7.2,-36.4 -9.6,-36.4 -10.2,-35.8 -10.2,-32.2 -10.2,-31 -9.5,-30.3 -8.7,-29.5 -8.7,-15.4 -8.7,-14.9 -10,-13.6 -10,-11.4 -10,-2.1 -9.3,-1.4 -9.2,-1.3 -6.7,-1.3 11,-1.3 12.8,-3.1 15,-5.3 15,-8.5 15,-9.9 14.7,-10.2 13.6,-10.2 12.7,-10.2 12,-9.5 6,-3.5 -0.1,-3.5 -6.2,-3.5 -7.3,-4.6 -7.6,-4.9 -7.6,-6.9 -7.6,-12 -6.6,-13 -6.1,-13.5 -6.1,-19.1
NetC3_2 on Top Layer "Bottom Layer-No Net 1" (solid, pour order 37): -6.5,-54.3 -9.5,-54.3 -10.8,-54.3 -11.8,-53.3 -12,-53.1 -12,-47.8 -12,-38 -11.2,-37.2 -11.1,-37.1 -9,-37.1 -5,-37.1 -4.3,-36.4 -3.1,-35.2 -3.1,-18 -3.1,-17.3 0.1,-14.1 0.2,-14 2,-14 4.3,-14 5.2,-13.1 7.5,-10.8 21.6,-10.8 30.6,-10.8 31,-10.4 31,-7.5 31,-6.5 31.3,-6.2 32.4,-6.2 32.7,-6.2 32.9,-6.4 33,-6.5 33,-7.1 33,-10.7 32.5,-11.2 31.2,-12.5 29.7,-12.5 8,-12.5 5.9,-14.6 4.5,-16 2.4,-16 1.8,-16 -0.2,-18 -1.1,-18.9 -1.1,-20.3 -1.1,-36.6 -2.6,-38.1 -3,-38.5 -7.9,-38.5 -8.5,-38.5 -9.2,-39.2 -9.7,-39.7 -9.7,-45.2 -9.7,-50.8 -9.2,-51.3 -8.9,-51.6 -7.5,-51.6 -6.5,-51.6 -6.1,-52 -6.1,-53.9 -6.5,-54.3
GND on Top Layer "Bottom Layer-No Net 1" (solid, pour order 38): -8.3,-39.3 -8.3,-40.5 -8.1,-40.7 -7.7,-41.1 -6.7,-41.1 -0.4,-41.1 0.7,-40 1.2,-39.5 1.2,-36.7 1.2,-20.2 2.3,-19.1 2.8,-18.6 3.9,-18.6 11,-18.6 12,-17.6 12.3,-17.3 14.3,-17.3 14.8,-17.3 16.3,-18.8 17.2,-19.7 21.1,-19.7 45.8,-19.7 47.1,-18.4 47.7,-17.8 47.7,-13.4 47.7,-12.3 47.1,-11.7 47,-11.6 46.2,-11.6 45.6,-11.6 45.4,-11.8 45.3,-11.9 45.3,-12.8 45.3,-16 44.3,-17 43.8,-17.5 35.4,-17.5 32.5,-17.5 30.6,-15.6 30,-15 28.6,-15 28.3,-15 26.4,-16.9 25.5,-17.8 20.5,-17.8 18.1,-17.8 15.4,-15.1 15.1,-14.8 12.3,-14.8 11.5,-14.8 9.4,-16.9 8.9,-17.4 6.1,-17.4 5.4,-17.4 5.1,-17.1 5,-17 3.6,-17 1.9,-17 0.1,-18.8 -0.4,-19.3 -0.4,-22.7 -0.4,-36.9 -2.2,-38.7 -2.4,-38.9 -6.9,-38.9 -7.9,-38.9 -8.3,-39.3
GND on Top Layer "Bottom Layer-No Net 1" (solid, pour order 39): 12.3,-17.3 12.8,-17.3 13,-17.5 13.2,-17.7 13.2,-18.4 13.2,-19.5 12.7,-20 1.8,-30.9 1.8,-35.6 1.8,-44.6 2.2,-45 4,-46.8 4,-50 4,-51.7 5.7,-53.4 5.9,-53.6 7.9,-53.6 9.5,-53.6 10,-54.1 10.3,-54.4 10.3,-55 10.3,-55.2 10.7,-55.6 11.4,-55.6 11.7,-55.3 11.7,-54.5 11.7,-54.3 12.2,-53.8 13.7,-53.8 14,-53.8 14.1,-53.9 14.3,-54.1 14.3,-54.6 14.3,-55.3 14.6,-55.6 15.4,-55.6 15.7,-55.3 15.8,-55.2 15.8,-54.3 15.8,-52.7 15.4,-52.3 15.3,-52.2 12.9,-52.2 7.4,-52.2 6,-50.8 5.7,-50.5 5.7,-48.7 5.7,-45.6 3.8,-43.7 3.7,-43.6 3.7,-39.9 3.7,-31.4 5.6,-29.5 14.8,-20.3 14.8,-17.7 14.9,-17.6 15.3,-17.6 15.3,-16.1 14.4,-15.2 14.3,-15.3 12.6,-15.3
GND on Top Layer "Bottom Layer-No Net 1" (solid, pour order 45): 30.4,-21.9 22.7,-21.9 22.2,-22.4 21.3,-23.3 21.3,-25 21.3,-34.2 20.2,-35.3 19.5,-36 19.5,-37.1 19.5,-37.4 19.9,-37.8 21.9,-37.8 23.8,-37.8 24.2,-38.2 24.4,-38.4 24.4,-40 23.8,-40.6 22.9,-41.5 22.9,-43.4 22.9,-43.7 23.3,-44.1 23.6,-44.4 24.5,-44.4 24.7,-44.4 25,-44.1 25.2,-43.9 25.2,-43.1 25.2,-42.2 26.4,-41 26.4,-37.6 26.4,-36.8 25.8,-36.2 25.4,-35.8 24,-35.8 23.2,-35.8 22.9,-35.5 22.8,-35.4 22.8,-31.3 22.8,-26.1 23.9,-25 24.9,-24 30.4,-24 30.6,-24 30.8,-23.8 30.8,-22.1 30.6,-21.9
GND on Top Layer "Bottom Layer-No Net 1" (solid, pour order 47): 32.6,-27.5 34.5,-25.6 35.8,-24.3 42.2,-24.3 45.1,-24.3 45.9,-25.1 46.6,-25.8 46.6,-28.3 46.6,-35.5 47.3,-36.2 50.3,-39.2 50.3,-43.6 50.3,-44.3 49.8,-44.8 49.7,-44.9 48,-44.9 47.9,-44.9 47.5,-44.5 47.1,-44.1 47.1,-42.1 47.1,-40.6 46,-39.5 44.3,-37.8 44.3,-31.7 44.3,-28.6 43.5,-27.8 43.4,-27.7 42.7,-27.7 41.3,-27.7 40.2,-28.8 38.5,-30.5 36.4,-30.5 32.6,-30.5 32.2,-30.1 32.2,-27.9
GND on Top Layer "Bottom Layer-No Net 1" (solid, pour order 53): 61.1,0 61.1,-2.8 61.1,-2.9 61.2,-3 61.4,-3.2 62.7,-3.2 62.9,-3.2 63.1,-3.4 63.1,-5.4 63.1,-5.6 63,-5.7 62.9,-5.8 62.2,-5.8 61.2,-5.8 61.1,-5.9 61,-6 61,-10.8 61,-11.2 62.2,-12.4 67.2,-17.4 72,-17.4 94.1,-17.4 95.3,-18.6 95.5,-18.8 95.5,-23.7 95.5,-23.9 95.9,-24.3 98,-24.3 98,-16.6 98,-14.8 67.4,-14.8 63.9,-11.3 63.9,-7.8 63.9,-7 64.4,-6.5 64.6,-6.3 64.6,0
GND on Top Layer "Bottom Layer-No Net 1" (solid, pour order 57): 28.9,-15 30,-15 30.1,-15 30.5,-14.6 31.4,-14.6 32.2,-14.6 32.9,-13.9 34,-12.8 38.1,-12.8 38.8,-12.8 39.1,-13.1 39.1,-13.6 39.1,-14.1 38.7,-14.5 38.4,-14.8 37.3,-14.8 33.9,-14.8 33.5,-15.2 33.1,-15.6 31.7,-15.6 31.5,-15.6 31,-16.1 29.646,-17.454 28.753,-17.454
GND_IN on Top Layer "Bottom Layer-No Net 1" (solid, pour order 60): 72.4,-3.8 66.5,-3.8 66.5,-6.5 66.9,-6.9 70.2,-10.2 70.2,-11.9 70.2,-12.7 70.8,-13.3 71.2,-13.7 72.3,-13.7 72.5,-13.7 72.8,-13.4 73.5,-12.7 73.5,-11 73.5,-4.2 73.1,-3.8 72.3,-3.8

## Keep-outs
Keep-Out Layer:
  the board outline again, w0.1

## Silkscreen, mask and mechanical layers (free items; w line width, h text height)
Top Overlay:
  text "B" at 77,-2 h1
  text "A" at 84,-2 h1
  text "L" at -24,-3 h1
  text "L" at 65,-5 h1
  text "R" at 65,-19 h1
  text "R" at -24,-20 h1
  text "L" at 69.25,-46.75 h1
  text "G" at 71.75,-46.75 h1
  text "R" at 74.25,-46.75 h1
  text "L" at 80,-46.75 h1
  text "G" at 82.5,-46.75 h1
  text "R" at 85,-46.75 h1
  text "-" at 91,-46.75 h1
  text "+" at 93.75,-46.75 h1

## Text inside footprints (layer, text, board x,y; h text height)
C1: Top Overlay "+" at 57.75,-23.15 h0.89 r90; Mechanical 5 "+" at 57.75,-23.15 h0.89 r90
C2: Top Overlay "+" at -7.75,-29.711 h0.89 r270; Mechanical 5 "+" at -7.75,-29.711 h1 r270
C3: Top Overlay "+" at -7.75,-42.961 h0.89 r270; Mechanical 5 "+" at -7.75,-42.961 h1 r270
C4: Top Overlay "+" at 22.9,-15.5 h0.89 r180; Mechanical 5 "+" at 22.9,-15.5 h0.89 r180
C5: Top Overlay "+" at 25.6,-16.5 h0.89; Mechanical 5 "+" at 25.6,-16.5 h0.89
C12: Top Overlay "+" at -7.294,-29.052 h1 r90
C13: Top Overlay "+" at 0.206,-29.052 h1 r90
C14: Top Overlay "+" at 53.052,-51.044 h1 r180
C15: Top Overlay "+" at 53.302,-32.294 h1 r180
C21: Top Overlay "+" at -25.044,-29.052 h1 r90
C22: Top Overlay "+" at -17.544,-29.052 h1 r90
C23: Top Overlay "+" at 28.552,-51.044 h1 r180
C24: Top Overlay "+" at 28.552,-32.294 h1 r180
D3: Top Overlay "~" at -21,-46 h1 r270; Top Overlay "~" at -21,-41 h1 r270; Top Overlay "-" at -17.8,-53.4 h1 r270; Top Overlay "+" at -17.8,-33.4 h1 r270; Mechanical 5 "~" at -18.75,-46.25 h1 r270; Mechanical 5 "~" at -18.5,-41 h1 r270; Mechanical 5 "-" at -17.75,-51.25 h1 r270; Mechanical 5 "+" at -17.75,-35.75 h1 r270